# EAGLE board elect (EAGLE 9.7.0)

Size 250 x 120 mm. Coordinates in mm from the lower left corner, seen from the top.
Outline: 0,0 250,0 250,120 0,120 0,0
Copper layers used: 

## Placement (x,y rotation side)
ACTUATOR1  SERVO01  [SG90]  150,80 0 top
ACTUATOR2  SERVO02  [SG90]  200,80 0 top

## Library data of the parts
ACTUATOR1 ACTUATOR2 = TinkerTools

## Nets
SERVO_SIGNAL_1: ACTUATOR1.1 ACTUATOR2.1

## Tracks (layer width: path | path; a pad name or v marks a point on that pad's centre or on a via)
SERVO_SIGNAL_1  (1 unrouted)